# Altium PCB 9,5,12PCB.PcbDoc
Units mil, origin at the board's own origin, x right, y up, seen from the top; angles counter-clockwise.
Board outline 6000 x 4000 mil, 4 copper layers (Top Layer, Signal Layer 1, GND, Bottom Layer), stack 30.634 mil thick; 73 components, 95 nets, 217 pads, 90 vias.
Unrouted connection lines stored in the file: 25.
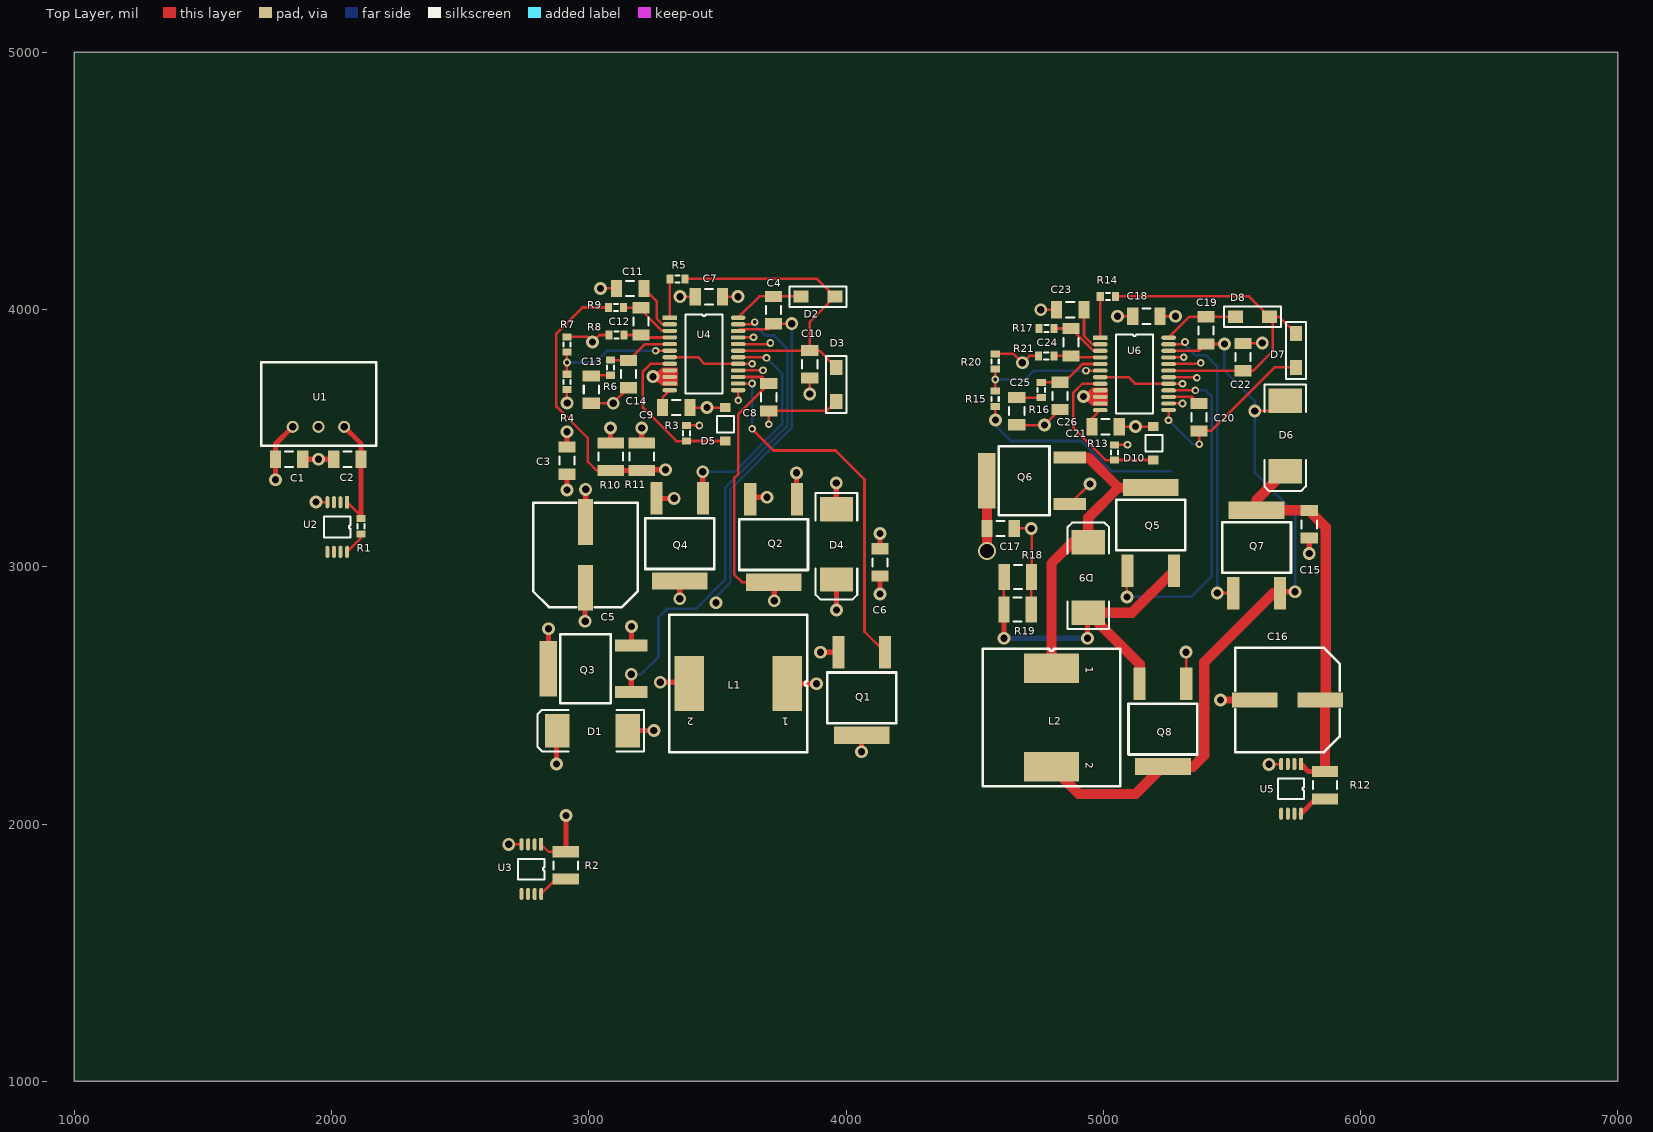
[diagram p0: Top Layer view]
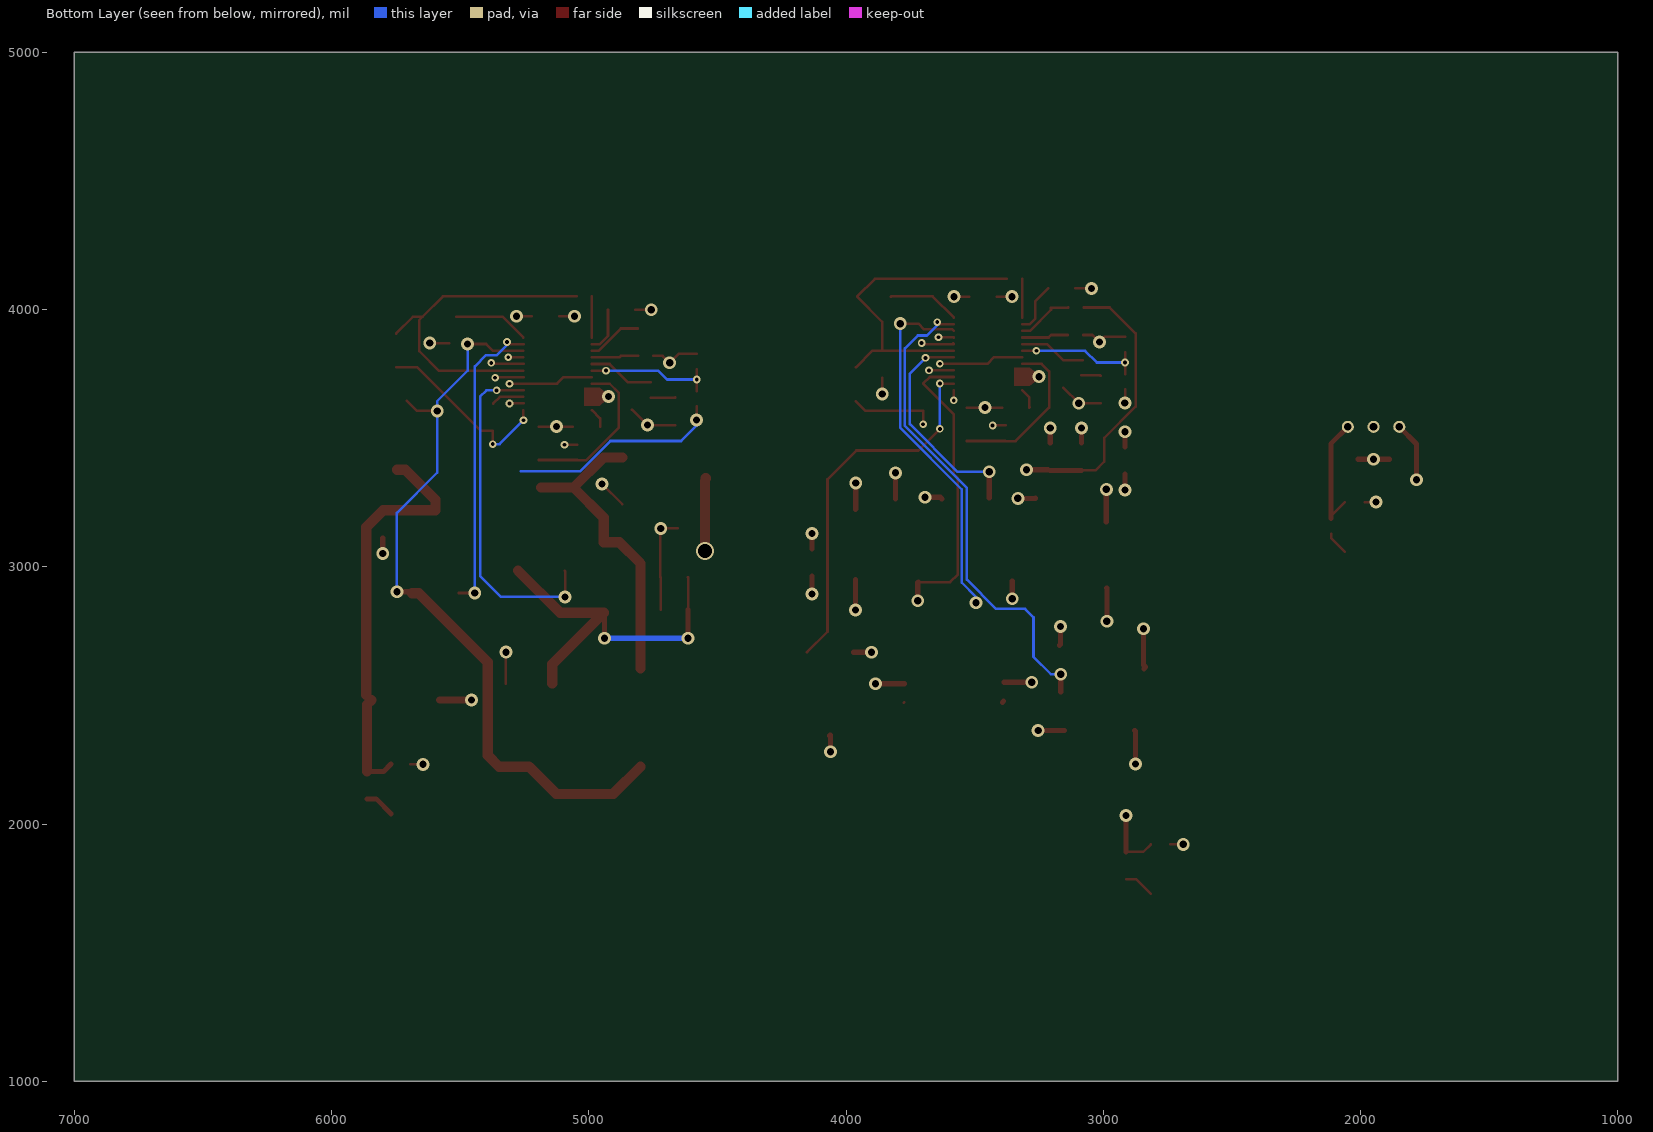
[diagram p1: Bottom Layer view, seen from below]
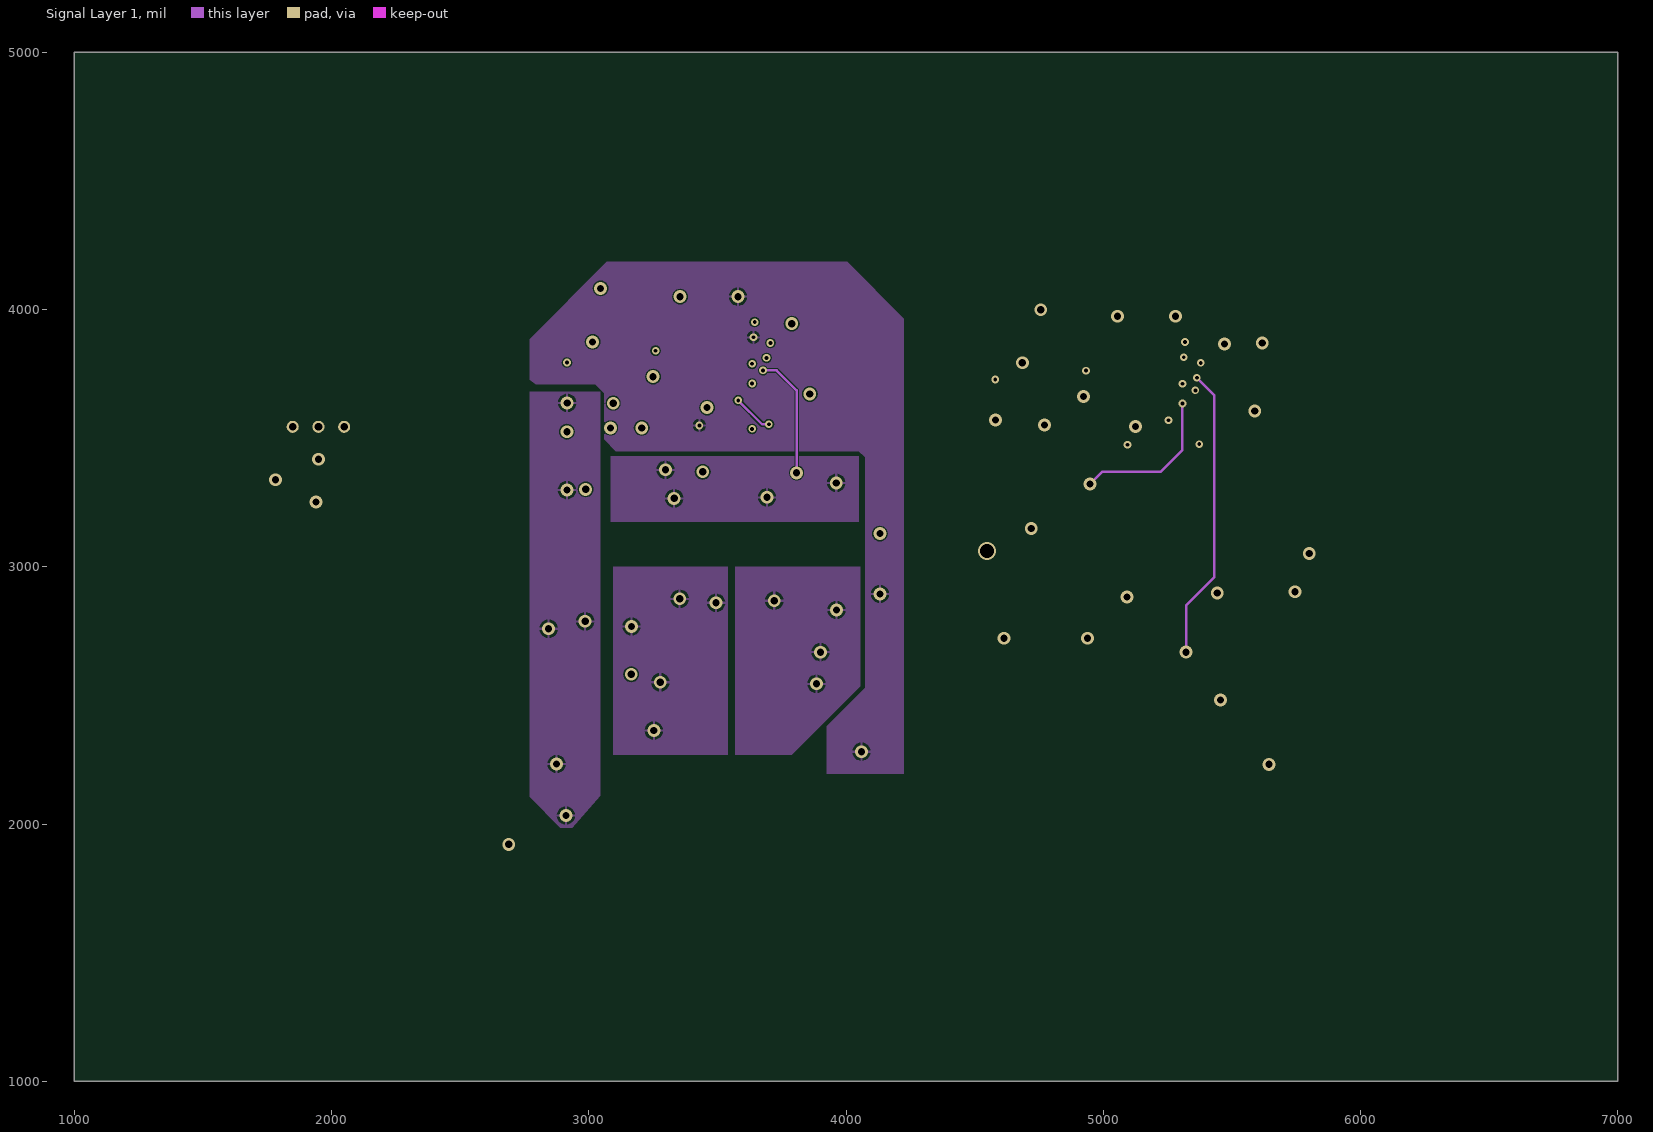
[diagram p2: Signal Layer 1]
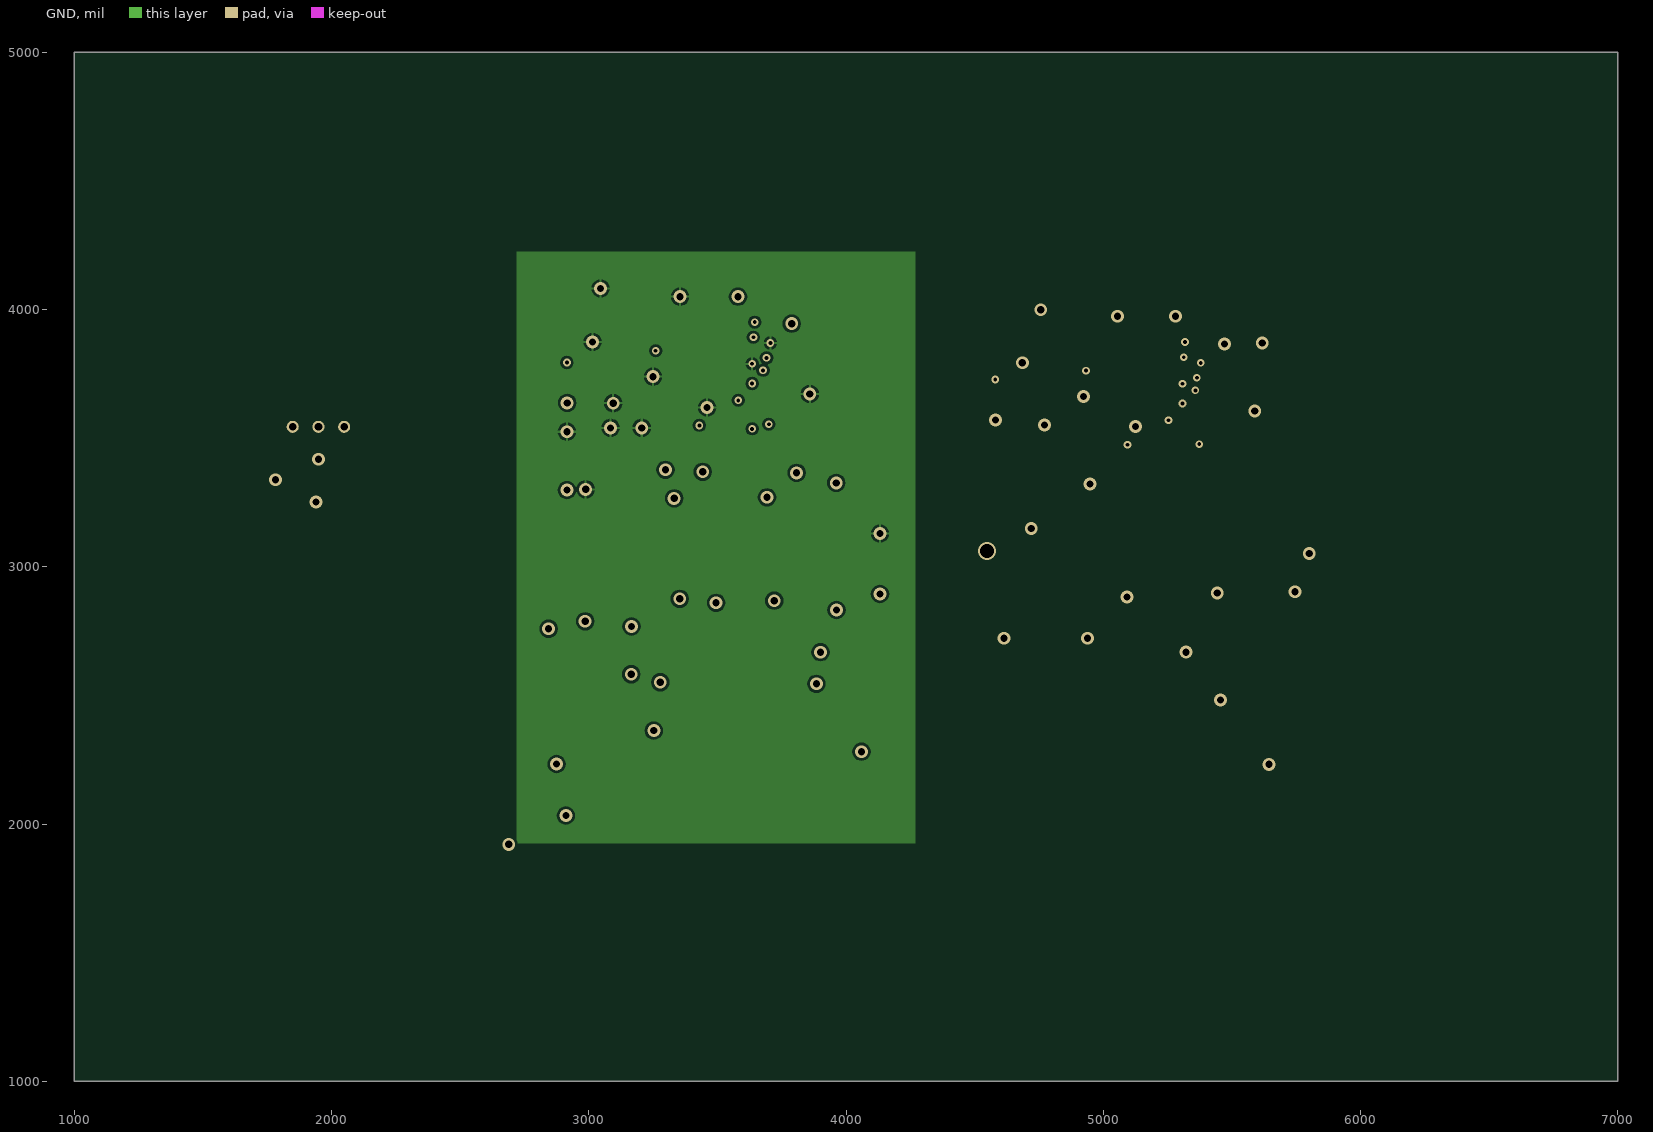
[diagram p3: GND]

## Layer stack, top to bottom
Top Solder: solder mask 0.4, Solder Resist, Dk 3.5
Top Layer: signal copper 1.4
Dielectric 1: core 10, FR-4, Dk 4.2
Signal Layer 1: signal copper 1.417
Dielectric 3: prepreg 5, Dk 4.2
GND: signal copper 1.417
Dielectric 2: core 10, Dk 4.2
Bottom Layer: signal copper 1.4
Bottom Solder: solder mask 0.4, Solder Resist, Dk 3.5

## Board outline
1000,1000 7000,1000 7000,5000 1000,5000

## Design rules (kind name [scope] priority, off if disabled: settings)
Clearance Clearance_2 [InNamedPolygon('GND-No Net')] p1: gap=10 ignorepadtopadclearanceinfootprint=FALSE except(0: Arc-Hole Track-Hole SMDPad-Hole THPad-Hole Via-Hole Fill-Hole Poly-Hole Region-Hole Text-Hole)
Clearance Clearance_1 [InNamedPolygon('14.8V_L02_P008')] p2: gap=10 ignorepadtopadclearanceinfootprint=FALSE except(0: Arc-Hole Track-Hole SMDPad-Hole THPad-Hole Via-Hole Fill-Hole Poly-Hole Region-Hole Text-Hole)
Clearance [All] p3: gap=5 ignorepadtopadclearanceinfootprint=TRUE
PolygonConnect [All] p1: connectstyle=Relief reliefconductorwidth=10 reliefentries=4 polygonreliefangle="90 Angle" airgapwidth=10
RoutingVias [All] p1: holewidth=28 width=50 viastyle="Through Hole" minholewidth=15 minwidth=30 maxholewidth=60 maxwidth=80
SolderMaskExpansion [All] p1: expansion=4
Width [All] p1: maxlimit=50 minlimit=10 preferedwidth=10
30 further rules are at their usual default settings.

## Classes and differential pairs
component class Full_Power_Board: U13
component class 48V: U11 U12
component class 48V_0.5A: U9 U10
component class 19V: C28 D12 D13 D15 Q9 Q10 Q11 Q12 U7 U8
component class 12V: C15 C16 C17 C18 C19 C20 C21 C22 C23 C24 C25 C26 D6 D7 D8 D9 D10 L2 Q5 Q6 Q7 Q8 R12 R13 R14 R15 R16 R17 R18 R19 R20 R21 U5 U6
component class 9V: C3 C4 C5 C6 C7 C8 C9 C10 C11 C12 C13 C14 D1 D2 D3 D4 D5 L1 Q1 Q2 Q3 Q4 R2 R3 R4 R5 R6 R7 R8 R9 R10 R11 U3 U4
component class 5V: C1 C2 R1 U1 U2

## Components (designator, comment, footprint, x,y, rotation, side; value= is the part's Value field where it differs from the comment)
C1 "10uF" C1206 1834.85,3418 r180 top
C2 "10uF" C1206 2062,3418 r0 top
C3 "Cap Semi" C1206 2915,3413 r270 top value=22u
C4 "Cap Semi" C1206 3718,3998 r90 top value=0.22u
C5 "390uF" PCV1E391MCL2GS 2987,3046 r180 top
C6 "Cap Semi" C1206 4132,3017 r270 top value=27u
C7 "Cap Semi" C1206 3467,4050 r0 top value=3.3u
C8 "Cap Semi" C1206 3700,3659 r270 top value=0.22u
C9 "Cap Semi" C1206 3340,3619 r180 top value=0.001u
C10 "Cap Semi" C1206 3859.33,3787.03 r90 top value=4.7u
C11 "Cap Semi" C1206 3161,4082 r0 top value=0.001u
C12 "Cap Semi" C1206 3203,3954 r90 top value=100p
C13 "Cap Semi" C1206 3010,3689 r90 top value=0.01u
C14 "Cap Semi" C1206 3155,3749 r90 top value=100p
C15 "Cap Semi" C1206 5801,3165 r90 top value=22u
C16 "390uF" PCV1E391MCL2GS 5716.51,2482 r270 top
C17 "Cap Semi" C1206 4601,3149 r180 top value=27u
C18 "Cap Semi" C1206 5167.85,3974 r0 top value=3.3u
C19 "Cap Semi" C1206 5399,3919 r90 top value=0.22u
C20 "Cap Semi" C1206 5372,3581 r270 top value=0.22u
C21 "Cap Semi" C1206 5009,3544 r180 top value=0.001u
C22 "Cap Semi" C1206 5543,3815 r270 top value=4.7u
C23 "Cap Semi" C1206 4872,3999 r0 top value=0.001u
C24 "Cap Semi" C1206 4875,3873 r90 top value=100p
C25 "Cap Semi" C1206 4664,3605 r90 top value=0.01u
C26 "Cap Semi" C1206 4832,3664 r90 top value=100p
D1 "MBRS340" SMC 3014.19,2363 r180 top
D2 "1N5819HW" 1N5819HW 3890.94,4050 r180 top
D3 "1N5819HW" 1N5819HW 3962,3709 r270 top
D4 "MBRS340" SMC 3963,3087 r270 top
D5 "MMSZ5230B" MMSZ5230B 3530,3554 r270 top
D6 "MBRS340" SMC 5707,3508.19 r270 top
D7 "1N5819HW" 1N5819HW 5749,3841 r270 top
D8 "1N5819HW" 1N5819HW 5580,3972 r180 top
D9 "MBRS340" SMC 4942,2958 r90 top
D10 "MMSZ5230B" MMSZ5230B 5195,3480 r270 top
L1 "SRR1240-4R7MCT" SRR1240-4R7M 3581,2546 r180 top
L2 "SRR1240-4R7MCT" SRR1240-4R7M 4799,2414.06 r270 top
Q1 "BUK6212-40C" BUK6212-40C 4151.55,2667.83 r180 top locked
Q2 "BUK6212-40C" BUK6212-40C 3809.1,3263 r180 top
Q3 "BUK6212-40C" BUK6212-40C 3165,2513 r90 top
Q4 "BUK6212-40C" BUK6212-40C 3444,3267 r180 top
Q5 "BUK6212-40C" BUK6212-40C 5093.91,2985.17 r0 top
Q6 "BUK6212-40C" BUK6212-40C 4869.83,3243.45 r90 top
Q7 "BUK6212-40C" BUK6212-40C 5505.45,2897.17 r0 top
Q8 "BUK6212-40C" BUK6212-40C 5322.55,2545.83 r180 top
R1 "Res3" J1-0603 2114,3157.47 r270 top value=10m
R2 "Res3" 14-1210 2911,1839 r270 top value=6m
R3 "Res3" J1-0603 3380,3519 r90 top value=51k
R4 "Res3" J1-0603 2915,3719 r270 top value=205k
R5 "Res3" J1-0603 3345,4119 r180 top value=100k
R6 "Res3" J1-0603 3085,3774 r90 top value=100k
R7 "Res3" J1-0603 2915,3864 r270 top value=20k
R8 "Res3" J1-0603 3108,3901 r180 top value=100
R9 "Res3" J1-0603 3106,4008 r180 top value=100
R10 "Res3" 14-1210 3085,3428 r270 top value=0.018
R11 "Res3" 14-1210 3206,3428 r270 top value=0.018
R12 "Res3" 14-1210 5862,2151 r270 top value=3m
R13 "Res3" J1-0603 5044,3444 r90 top value=51k
R14 "Res3" J1-0603 5018,4051 r180 top value=100k
R15 "Res3" J1-0603 4580,3653 r270 top value=113k
R16 "Res3" J1-0603 4759,3687 r90 top value=100k
R17 "Res3" J1-0603 4779.47,3927 r180 top value=100
R18 "Res3" 14-1210 4668.15,2960 r180 top value=0.018
R19 "Res3" 14-1210 4667,2834 r180 top value=0.018
R20 "Res3" J1-0603 4580,3798 r270 top value=8.06k
R21 "Res3" J1-0603 4778.47,3820 r180 top value=100
U1 "R-78E-0.5" R-78E-0.5 1722.62,3465.26 r0 top
U2 "AD8217" AD8217 2060.59,3251 r270 top
U3 "AD8217" AD8217 2815.18,1921 r270 top
U4 "LTC3780EG#PBF" "LTC3780 24-Leaqd Plastic SSOP" 3315,3968.13 r0 top
U5 "AD8217" AD8217 5768.59,2232.91 r270 top
U6 "LTC3780EG#PBF" "LTC3780 24-Leaqd Plastic SSOP" 4988.25,3890.54 r0 top

## Footprints (in the part's own frame and the unit in brackets; to place one, negate y for a bottom-side part, rotate by r counter-clockwise, add the part's x,y. Pads: shape width x height; smd on the part's side, far side on the other; paste and mask are expansions set on the pad)
1N5819HW [mm]
  rect 1.5x1.2 smd: 1(-1.675,0) 2(1.675,0)
  silkscreen extent -2.83,-1 2.83,1
14-1210 [mm] "Chip Resistor, Body 3.2x2.5mm, IPC High Density"
  rect 1.1x2.6 smd: 1(-1.35,0) 2(1.35,0)
  silkscreen extent -0.4,-1.2 0.4,1.2, body extent -1.68,-1.32 1.68,1.32, height 0.9
AD8217 [mm]
  rect 1.2x0.4 smd: 1(0,0)
  oval 1.2x0.4 smd: 2(0,-0.65) 3(0,-1.3) 4(0,-1.95) 5(4.9,-1.95) 6(4.9,-1.3) 7(4.9,-0.65) 8(4.9,0)
  silkscreen extent 1.43,-2.28 3.47,0.33
BUK6212-40C [mm]
  rect 1.2x3.2 smd: 1(0,0) 2(4.6,0)
  rect 5.5x1.7 smd: 3(2.3,8.2)
  silkscreen extent -1.1,2 5.7,7
C1206 [mm] "Chip Capacitor, Body 3.2x1.6mm, IPC High Density"
  rect 1.1x1.7 smd: 1(-1.35,0) 2(1.35,0)
  silkscreen extent -0.4,-0.75 0.4,0.75, body extent -1.7,-0.9 1.7,0.9, height 1.3
J1-0603 [mm] "Chip Resistor, Body 1.6x0.8mm, IPC High Density"
  rect 0.7x0.9 smd: 1(-0.75,0) 2(0.75,0)
  silkscreen extent -0.2,-0.35 0.2,0.35, body extent -0.85,-0.48 0.85,0.48, height 0.9
"LTC3780 24-Leaqd Plastic SSOP" [mm]
  rect 1.45x0.42 smd: 1(0,0)
  oval 1.45x0.42 smd: 2(0,-0.65) 3(0,-1.3) 4(0,-1.95) 5(0,-2.6) 6(0,-3.25) 7(0,-3.9) 8(0,-4.55) 9(0,-5.2) 10(0,-5.85) 11(0,-6.5) 12(0,-7.15) 13(6.75,-7.15) 14(6.75,-6.5) 15(6.75,-5.85) 16(6.75,-5.2) 17(6.75,-4.55) 18(6.75,-3.9) 19(6.75,-3.25) 20(6.75,-2.6) 21(6.75,-1.95) 22(6.75,-1.3) 23(6.75,-0.65) 24(6.75,0)
  silkscreen extent 1.56,-7.48 5.19,0.33
MMSZ5230B [mm]
  rect 0.9x1.025 smd: 1(-1.65,0) 2(1.65,0)
  silkscreen extent -0.8,-0.8 0.8,0.9
PCV1E391MCL2GS [mm]
  rect 1.5x4.5 smd: 1(0,3.25) 2(0,-3.25)
  silkscreen extent -5.15,-5.15 5.15,5.15
R-78E-0.5 [mm]
  round 1.2 hole 0.762: 1(3.21,2) 2(5.75,2) 3(8.29,2)
  silkscreen extent 0.13,0.13 11.48,8.37
SMC [mm] "DO-214-AB/SMC; 2 C-Bend Leads; Body 7.9 x 5.9 mm, inc. leads (LxW)"
  rect 2.4x3.3 smd: 1(-3.475,0) 2(3.475,0)
  silkscreen extent -5.07,-2.05 5.43,2.05
SRR1240-4R7M [mm]
  rect 2.9x5.4 smd: 1(-4.85,0) 2(4.85,0)
  silkscreen extent -6.8,-6.8 6.8,6.8

## Part data
C1 C2: library part "Cap Semi", "Capacitor (Semiconductor SIM Model)", LatestRevisionDate=29-May-2009, LatestRevisionNote="IPC-7351 Footprint Added.", PackageDescription="Chip Capacitor", PackageReference=C1206, Published=8-Jun-2000, Publisher="Altium Limited"
C3 C4 C6 C7 C8 C9 C10 C11 C12 C13 C14 C15 C17 C18 C19 C20 C21 C22 C23 C24 C25 C26: "Capacitor (Semiconductor SIM Model)", LatestRevisionDate=29-May-2009, LatestRevisionNote="IPC-7351 Footprint Added.", PackageDescription="Chip Capacitor", PackageReference=C1206, Published=8-Jun-2000, Publisher="Altium Limited"
C5 C16: library part PCV1E391MCL2GS, "Aluminum Capacitor"
D1 D4 D6 D9: library part Diode, "Default Diode", Code_JEDEC=DO-214-AB, LatestRevisionDate=17-Jul-2002, LatestRevisionNote="Re-released for DXP Platform.", PackageDescription="DO-214-AB/SMC; 2 C-Bend Leads; Body 7.9 x 5.9 mm, inc. leads (LxW)", PackageReference=SMC, PackageVersion=Sep-1996, Published=8-Jun-2000, Publisher="Altium Limited"
D2 D3 D7 D8: "1A Schottky Barrier Rectifier"
D5 D10: "Zener Diode"
L1 L2: "Inductor"
Q1 Q2 Q3 Q4 Q5 Q6 Q7 Q8: "N-Channel TrenchMOS Intermediate Level FET"
R1 R2 R3 R4 R5 R6 R7 R8 R9 R10 R11 R12 R13 R14 R15 R16 R17 R18 R19 R20 R21: "Resistor", LatestRevisionDate=29-May-2009, LatestRevisionNote="IPC-7351 Footprint Added.", PackageDescription="Chip Resistor", PackageReference=J1-0603, Published=8-Jun-2000, Publisher="Altium Limited"
U1: "DC/DC Converter"
U2 U3 U5: "Current Shunt Moniter"
U4 U6: "Buck-boost Controller, Constant Frequency, Current Mode Control with Power Good Output, 24-pin SOP (G-24), -40 to 85 degC, Pb-Free", Frequency Sync Range="200kHz - 400kHz", Manufacturer="Linear Technology", PackageDesciption="24-Pin Plastic SSOP, Body 8.2 x 5.3 mm, Pitch 0.65 mm", Supplier Part Number 1=LTC3780EG#PBF-ND, ComponentLink1Description="Manufacturer URL", ComponentLink1URL=http://www.linear.com/, ComponentLink2Description=Datasheet, ComponentLink2URL=http://cds.linear.com/docs/en/datasheet/3780ff.pdf, ComponentLink3Description="Package Specification", ComponentLink3URL=http://cds.linear.com/docs/en/packaging/SSOP_24_05-08-1640.pdf, DatasheetVersion="Rev. F", Mounting Technology="Surface Mount", Number of Outputs=1, PackageReference=G-24, PackageVersion=Jun-10, PartNumber=LTC3780EG#PBF, RoHS=TRUE, Supplier 1=Digi-Key, Supplier 2=Farnell, Supplier 3=Newark, Supplier Part Number 2=1273545, Supplier Part Number 3=56M8395

## Via types
v1: diameter 50, hole 28, Top Layer to Bottom Layer, 64 vias
v2: diameter 30, hole 15, Top Layer to Bottom Layer, 25 vias
v3: diameter 70, hole 55, Top Layer to Bottom Layer, 1 vias

## Nets (pads, with @x,y where several pads share a name; then routed paths per layer and width w, separated by ;. In a path a pad name is that pad's centre, name@x,y a point inside that pad or via, vN(x,y) a via of type N, cw(c..) or ccw(c..) an arc to the next point about the centre after c; other vN are vias at no path point)
14.8V: C1.2 C6.2 C7.2 C17.2 C18.2 Q1.3 Q6.3 R3.2 R13.2 U1.1 U4.21 U6.21 | length 981.5
  Top Layer w10: R3.2@3380,3549.47 v2(3430,3549.47) ; C7.2 v1(3580,4050) ; U4.21 3581.39,3892 v2(3640,3892) ; Q6.3@4544,3344 Q6.3@4544.85,3343.15 ; C17.2 C17.2@4548,3148.85 ; R13.2@5044,3474.47 v2(5094,3474.47) ; C18.2@5221.15,3974 v1(5281,3974) ; U6.21@5254.39,3814.66 v2(5313,3814.66)
  Top Layer w20: v1(1781.7,3338.3) C1.2 1781.7,3476.7 U1.1 ; v1(4060,2281) 4060,2340 4063,2343 Q1.3 ; v1(4132,2894.13) C6.2
  Top Layer w40: Q6.3@4544.85,3343.15 Q6.3@4544.85,3344 ; C17.2 Q6.3@4547.85,3333.15 ; v3(4548,3061) C17.2@4548,3148.85
BG1-9V: Q4.1 U4.18 | length 870.1
  Top Layer w10: U4.18 v2@3681.41,3814.59
  Top Layer w20: Q4.1@3443,3268 v1(3443,3369.19)
  Bottom Layer w10: v1(3443,3369.19) 3566.19,3369.19 3752,3555 3752,3751 v2(3691,3812)
BG2-9V: Q2.1 U4.16 | length 681.4
  Top Layer w10: U4.16 v2(3677.41,3763.41)
  Top Layer w20: Q2.1@3808.1,3264 v1(3808.1,3365.19)
  Signal Layer 1 w10: v2(3677.41,3763.41) 3730.59,3763.41 3808.1,3685.9 v1(3808.1,3365.19)
GND: C1.1 C2.1 C3.1 C5.2 C6.1 C7.1 C9.1 C10.1 C11.1 C13.1 C14.1 C15.1 C16.2 C17.1 C18.1 C21.1 C22.1 C23.1 C25.1 C26.1 D5.1 D10.1 R7.1 R8.2 R10.1 R11.1 R18.1 R19.1 R20.1 R21.2 U1.2 U2.4 U3.4 U4.7 U4.9 U4.10 U4.11 U4.17 U4.20 U5.4 U6.7 U6.9 U6.10 U6.11 U6.17 U6.20 | length 3518.9
  Top Layer w10: v1(1940,3252) 1941,3251 U2.4 ; v1(2689,1921) U3.4 ; R7.1 2995.47,3893.53 v1(3015,3874) 3042,3901 R8.2 ; C13.1 v1(3095,3635.85) C14.1 ; v1(3046,4082) C11.1 ; v1@3236.85,3725.85 v1(3250,3739) ; U4.7 3424.41,3814.59 3450,3789 U4.17 v2(3635,3789) ; v1(3355,4050) C7.1 ; C9.1 3393.19,3618.96 v1(3460,3618.96) D5.1 ; U4.20@3582.98,3868 U4.20 3701.77,3865.77 v2(3706,3870) ; v1(3859.33,3671.67) C10.1 ; R20.1 4650.95,3827.53 v1(4685.47,3793) 4712.47,3820 R21.2 ; C17.1 v1(4720,3149) 4721.3,3147.7 R18.1 4720.15,2958.85 R19.1 ; C25.1@4664,3550.85 v1(4772,3550.85) C26.1 ; v1(4757,3999) C23.1 ; U6.7@4988,3737.25 5097.41,3737.25 5123,3711.66 v2(5308,3711.66) ; v1(5056,3974) C18.1 C18.1@5114.85,3974 ; C21.1 5063.15,3545 v1(5125,3545) v1(5125,3545) D10.1 ; U6.20@5253.75,3788.43 5374.77,3788.43 v2(5379,3792.66) ; C22.1 5616.15,3868.15 v1(5618,3870) ; v1(5644,2232) U5.4@5693.41,2232
  Top Layer w20: C1.1 v1(1949,3418) C2.1 ; C3.1 v1(2915,3525) ; C5.2 2988,3174.95 v1(2988,3301) ; R10.1 v1(3085,3540) ; R11.1 v1(3206,3540) ; C6.1 v1(4132,3129) ; v1(5801,3052) C15.1
  Top Layer w28: v1(5455.95,2482) C16.2@5580.05,2482
  other v1: 4923.25,3661.41
NetC2_2: C2.2 R1.1 U1.3 U2.1 | length 471
  Top Layer w10: U2.1 2114,3197.59 R1.1 ; C2.2@2114,3416.85 C2.2
  Top Layer w20: U1.3 2115.15,3477.85 C2.2 ; R1.1 C2.2@2114,3416.85
NetC3_2: C3.2 C5.1 D1.2 Q3.3 R2.1 R4.2 U3.1 | length 786.2
  Top Layer w10: U3.1 2844.03,1892.15 R2.1 ; R4.2 2915,3638 v1(2916,3637)
  Top Layer w20: Q3.3 2835.72,2610 2844,2618.28 v1(2844,2759) ; v1(2875,2233) 2875,2360.62 D1.2 ; R2.1 v1(2911,2032.87) ; v1(2915,3298) C3.2 ; v1(2986,2788) 2986,2917.05 C5.1
NetC4_1: C4.1 D1.1 L1.2 Q3.2 Q4.3 U4.22 | length 1786.3
  Top Layer w10: U4.22 3586.8,3923 3696.15,3923 C4.1 3788.85,3944.85 v1(3789,3945)
  Top Layer w20: D1.1 v1(3253,2363) ; v1(3166,2768) 3166,2698.9 Q3.2@3170,2694.9 ; v1(3278,2551) L1.2@3385.06,2551 ; v1(3353.45,2875.45) Q4.3 ; L1.2@3387.06,2478 L1.2@3392.06,2473
  Bottom Layer w10: v1(3495,2860) 3495,2883 3550,2938 3550,3301 3789,3540 v1(3789,3945)
NetC4_2: C4.2 D2.2 U4.24 | length 279.1
  Top Layer w10: U4.24 3663.76,4051.15 C4.2 3823.85,4051.15 D2.2
NetC8_1: C8.1 D4.2 L1.1 Q1.2 Q2.3 U4.15 | length 1468.4
  Top Layer w10: U4.15 3674.33,3737.82 C8.1 3581.43,3593.57 3581.43,3361.43 3565,3345 3565,2970 3594.83,2940.17 Q2.3 ; L1.1@3773.94,2473 L1.1@3774.94,2472
  Top Layer w20: Q2.3 3721,2937.72 v1(3721,2868) ; L1.1@3772.94,2545 v1(3885,2545) ; v1(3900.73,2667.83) Q1.2 ; v1(3963,2832) D4.2
NetC8_2: C8.2 D3.2 U4.13 | length 526.5
  Top Layer w10: U4.13 3581,3686.39 v2(3581,3647) ; v2(3700,3554) C8.2 3924.8,3605.85 D3.2
  Signal Layer 1 w10: v2(3581,3647) 3674,3554 v2(3700,3554)
NetC9_2: C9.2 U4.12 | length 81.9
  Top Layer w10: C9.2@3285,3620.85 C9.2 3286.85,3658.49 U4.12
NetC10_2: C10.2 D2.1 D3.1 R5.1 U4.19 | length 1269.4
  Top Layer w10: R5.1 3784,4119 3887.89,4119 D2.1 3859.33,3952.44 C10.2 ; U4.19 C10.2 ; D3.1 3896.76,3840.18 C10.2
NetC11_2: C11.2 U4.2 | length 198
  Top Layer w10: C11.2 3265,4031.15 3265,3964 3286.46,3942.54 U4.2
NetC12_1: C12.1 R8.1 U4.4 | length 181.5
  Top Layer w10: R8.1 3137.68,3900.85 C12.1 3212.49,3891.36 U4.4
NetC12_2: C12.2 R9.1 U4.3 | length 221.9
  Top Layer w10: R9.1 3136.38,4007.15 C12.2 3203,3999.15 3285.2,3916.95 U4.3
NetC13_2: C13.2 R6.1 | length 76
  Top Layer w10: C13.2 3012.32,3744.47 R6.1
NetC14_2: C14.2 R6.2 U4.5 | length 261.9
  Top Layer w10: R6.2@3080,3803.53 R6.2 3086.38,3802.15 C14.2 3218.62,3865.77 U4.5
NetC15_2: C15.2 C16.1 D6.2 Q7.3 R12.1 R15.2 U5.1 | length 2436.3
  Top Layer w10: v1@4580,3572 R15.2 ; C15.2@5799.15,3220 C15.2 ; C16.1 C16.1@5865,2502.54
  Top Layer w20: U5.1 5797.35,2204.15 R12.1
  Top Layer w40: D6.2@5745,3377.19 5712.81,3377.19 D6.2 5596,3260.38 Q7.3 C15.2@5799.15,3220 ; C15.2 5865,3154.15 C16.1@5865,2502.54 ; C16.1 5862,2464.46 R12.1
  Bottom Layer w10: v1(4581,3571) 4581,3549 4641,3489 4916,3489 5034,3371 5265,3371
NetC19_1: C19.1 D6.1 L2.2 Q7.2 Q8.3 U6.22 | length 2969.7
  Top Layer w10: U6.22 5254.3,3839.66 5323.36,3839.66 5323.65,3839.36 5372.51,3839.36 C19.1 5399.15,3866 v1(5471,3866) ; v1(5589,3606) 5668,3606 D6.1 ; Q7.2 5688.72,2895 Q7.2@5696.72,2903
  Top Layer w20: Q7.2@5696.72,2903 v1(5746,2903)
  Top Layer w40: L2.2 4905.11,2117 5126,2117 Q8.3 5349,2223 5393,2267 5393,2629 5661.17,2897.17 Q7.2
  Bottom Layer w10: v1(5471,3866) 5471,3762 5589,3644 v1(5589,3606) 5589,3366 5746,3209 v1(5746,2903)
NetC19_2: C19.2 D8.2 U6.24 | length 293.9
  Top Layer w10: U6.24 5335.61,3972.15 C19.2 5513.91,3972.15 D8.2
NetC20_1: C20.1 D9.2 L2.1 Q5.3 Q6.2 U6.15 | length 1338.4
  Top Layer w10: U6.15 5345.92,3660.23 C20.1
  Top Layer w40: L2.1 4799,3013 4880.81,3094.81 D9.2 4942,3190.54 5059.46,3308 ; Q6.2 4942.91,3424.55 5059.46,3308 ; Q5.3 5059.46,3308
NetC20_2: C20.2 D7.2 U6.13 | length 726.9
  Top Layer w10: v2(5254,3569.66) U6.13 ; v2(5373,3476.66) 5373,3528.51 5419.51,3528.51 5666.06,3775.06 D7.2
  Bottom Layer w10: v2(5254,3569.66) 5347,3476.66 v2(5373,3476.66)
NetC21_2: C21.2 U6.12 | length 78.5
  Top Layer w10: C21.2 4955.85,3576.65 U6.12
NetC22_2: C22.2 D7.1 D8.1 R14.1 U6.19 | length 1337.4
  Top Layer w10: R14.1 5566.94,4051 D8.1 ; U6.19 5254.74,3761.85 C22.2 5582.85,3761.85 5659,3838 5659,3958.94 D8.1 ; D7.1 5683.94,3972 D8.1
NetC23_2: C23.2 U6.2 | length 178.3
  Top Layer w10: C23.2 4925.15,3897.21 4957.41,3864.95 U6.2
NetC24_1: C24.1 R21.1 U6.4 | length 182.8
  Top Layer w10: R21.1 4808.15,3819.85 C24.1 4881.08,3813.77 U6.4
NetC24_2: C24.2 R17.1 U6.3 | length 215.6
  Top Layer w10: R17.1 4809.85,3926.15 C24.2 4961.79,3839.36 U6.3
NetC25_2: C25.2 R16.1 | length 95.3
  Top Layer w10: C25.2 4664.68,3657.47 R16.1
NetC26_2: C26.2 R16.2 U6.5 | length 258.9
  Top Layer w10: R16.2 4759.62,3717.15 C26.2 4848.15,3717.15 4919.18,3788.18 U6.5
NetC27_2: 
NetC31_1: 
NetC31_2: 
NetC32_1: 
NetC32_2: 
NetC33_2: 
NetC34_2: 
NetC35_2: 
NetC36_1: 
NetC36_2: 
NetC37_2: 
NetC38_2: 
NetC39_2: 
NetC40_2: 
NetC41_2: 
NetC42_2: 
NetC43_2: 
NetC44_2: 
NetC45_2: 
NetC46_2: 
NetD4_1: D4.1 Q2.2 Q4.2 R9.2 R10.2 R11.2 | length 1355.1
  Top Layer w10: R9.2 2975,4008 2874,3907 2874,3623 2996,3501 2996,3409 3030.15,3374.85 R10.2 ; R11.2 3209.85,3371 R11.2@3215.85,3377
  Top Layer w20: R10.2 R11.2 ; R11.2@3215.85,3377 v1(3298,3377) ; Q4.2 3263.9,3266 v1(3332,3266) ; Q2.2 3627,3264 3633,3270 v1(3693,3270) ; v1(3962,3326) 3962,3224.81 D4.1
NetD5_2: D5.2 R3.1 U4.8 | length 631.7
  Top Layer w10: U4.8 3240,3789 3210,3759 3210,3619 3340.47,3488.53 3380,3488.53 3380.51,3489.04 D5.2
NetD9_1: D9.1 Q5.2 Q8.2 R17.2 R18.2 R19.2 | length 1422.9
  Top Layer w10: R19.2@4614,2833.85 R19.2 4613.85,2958.85 R18.2 ; D9.1@4939,2818.19 D9.1
  Top Layer w20: v1(4614,2722) R19.2@4614,2833.85 ; v1(4939,2722) D9.1@4939,2818.19
  Top Layer w40: Q8.2 5141.45,2621.74 D9.1 5111.04,2821.19 Q5.2
  Bottom Layer w20: v1(4614,2722) v1(4939,2722)
NetD10_2: D10.2 R13.1 U6.8 | length 618.7
  Top Layer w10: U6.8 4918.41,3711.41 4884,3677 4884,3540 5009.53,3414.47 R13.1 5044.57,3415.04 D10.2
NetD14_1: 
NetD15_2: 
NetD16_1: 
NetD17_1: 
NetP2_3: R1.2 U2.8 | length 92
  Top Layer w10: U2.8 2114,3111.5 R1.2
NetP2_9: U2.5
NetP2_10: U3.5
NetP2_11: U5.5
NetP2_12: 
NetP2_13: 
NetP2_14: 
NetQ5_1: Q5.1 U6.16 | length 1335
  Top Layer w10: v1(5092,2883) 5092,2983.25 Q5.1 ; U6.16@5253.75,3686.07 v2@5350.41,3686.07
  Bottom Layer w10: v1(5092,2883) 5341,2883 5422,2964 5422,3662 5398.34,3685.66 v2(5358,3685.66)
NetQ6_1: Q6.1 U6.14 | length 760.5
  Top Layer w10: Q6.1 v1(4948,3321.61) ; U6.14@5253.75,3634.89 v2(5308,3634.89)
  Signal Layer 1 w10: v1(4948,3321.61) 4996.39,3370 5224,3370 5308,3454 v2(5308,3634.89)
NetQ7_1: Q7.1 U6.23 | length 1182.6
  Top Layer w10: U6.23@5253.75,3865.2 5309.54,3865.2 v2(5318,3873.66) ; v1(5443,2898) 5504.61,2898 Q7.1
  Bottom Layer w10: v2(5318,3873.66) 5318,3862 5357,3823 5399,3823 5443,3779 v1(5443,2898)
NetQ8_1: Q8.1 U6.18 | length 1374.1
  Top Layer w10: U6.18@5253.75,3737.25 5361.41,3737.25 v2(5364,3734.66) ; v1(5322,2668) 5322,2546.39 Q8.1
  Signal Layer 1 w10: v1(5322,2668) 5322,2850 5432,2960 5432,3666.66 v2(5364,3734.66)
NetQ9_1: 
NetQ10_1: 
NetQ11_1: 
NetQ12_1: 
NetR2_2: R2.2 U3.8 | length 119.7
  Top Layer w10: U3.8 2872.95,1785.85 R2.2
NetR4_1: R4.1 R7.2 U4.6 | length 505.1
  Top Layer w10: R4.1 v2(2915,3794) R7.2 ; v2(3260,3840) 3260.18,3840.18 U4.6
  Bottom Layer w10: v2(2915,3794) 3025,3794 3070,3839 3259,3839 v2(3260,3840)
NetR5_2: R5.2 U4.1 | length 151.1
  Top Layer w10: U4.1 3315.47,3968.61 R5.2
NetR12_2: R12.2 U5.8 | length 117.4
  Top Layer w20: U5.8 5826.44,2097.85 R12.2
NetR14_2: R14.2 U6.1 | length 160.5
  Top Layer w10: U6.1 4988.47,3890.76 R14.2
NetR15_1: R15.1 R20.2 U6.6 | length 508.3
  Top Layer w10: R15.1 v2(4580,3728) R20.2 ; v2@4933.43,3762.59 U6.6
  Bottom Layer w10: v2(4580,3728) 4696,3728 4730.41,3762.41 v2(4933.25,3762.41)
NetR22_2: 
NetR24_2: 
NetR25_1: 
NetR33_2: 
NetR34_1: 
NetR35_1: 
NetR37_2: 
NetR38_2: 
NetR40_2: 
NetR41_1: 
NetR42_1: 
NetR44_2: 
NetR45_2: 
NetU10_3: 
NetU12_3: 
TG1-9V: Q3.1 U4.23 | length 1918
  Top Layer w10: U4.23 3636.54,3942.54 v2(3645,3951)
  Top Layer w20: Q3.1 v1(3165,2582.1)
  Bottom Layer w10: v1(3165,2582.1) 3203.1,2582.1 3271,2650 3271,2803 3304,2836 3416,2836 3530,2950 3530,3307 3771,3548 3771,3849 3721,3899 3685,3899 3645,3939 v2(3645,3951)
TG2-9V: Q1.1 U4.14 | length 1453.8
  Top Layer w10: U4.14 v2(3635,3712.23) ; v2(3635,3536) 3719,3452 3960,3452 4072,3340 4072,2747.39 Q1.1
  Bottom Layer w10: v2(3635,3536) v2(3635,3712.23)
pads on no net: U2.2 U2.3 U2.6 U2.7 U3.2 U3.3 U3.6 U3.7 U5.2 U5.3 U5.6 U5.7

## Polygon pours and split planes (outlines as drawn)
GND on GND "GND-No Net" (solid, pour order 4): 2720,4225 4270,4225 4270,1925 2720,1925
14.8V on Signal Layer 1 (solid, pour order 30): 3925,2195 3925,2380 4075,2530 4075,3425 4050,3450 3105,3450 3060,3495 3060,3675 3025,3710 2793.33,3710 2770,3727.5 2770,3885 3070,4185 4005,4185 4225,3965 4225,2195
NetC3_2 on Signal Layer 1 (solid, pour order 28): 3045,2195 2770,2195 2770,2105 2890,1985 2935,1985 3045,2110
NetC3_2 on Signal Layer 1 (solid, pour order 26): 3045,2185 3045,3680 2770,3680 2770,2185
no net on Signal Layer 1 (solid, pour order 24): 3570,3415
NetD4_1 on Signal Layer 1 (solid, pour order 22): 4050,3175 3085,3175 3085,3430 4050,3430
no net on Signal Layer 1 (solid, pour order 20): 3325,2185
NetC4_1 on Signal Layer 1 (solid, pour order 18): 3540,3000 3095,3000 3095,2270 3540,2270
NetC8_1 on Signal Layer 1 (solid, pour order 16): 3570,3000 4055,3000 4055,2535 3790,2270 3570,2270
no net on Signal Layer 1 (solid, pour order 14): 3576,3002
no net on Signal Layer 1 (solid, pour order 12): 3576,3002
no net on Signal Layer 1 (solid, pour order 10): 3576,3002

## Other copper
Top Layer:
  region net GND: 5018.25,3696.41 5018.25,3626.41 4958.25,3626.41 4933.25,3646.41 4913.25,3646.41 4908.25,3651.41 4908.25,3671.41 4913.25,3676.41 4933.25,3676.41 4958.25,3696.41
  region net GND: 3252.5,3724
  region net GND: 3345,3774 3345,3704 3285,3704 3260,3724 3240,3724 3235,3729 3235,3749 3240,3754 3260,3754 3285,3774

## Text inside footprints (layer, text, board x,y; h text height)
L1: Top Overlay "1" at 3777.85,2412.14 h30 r180; Top Overlay "1" at 3777.85,2412.14 h30 r180; Top Overlay "2" at 3407.77,2412.14 h30 r180
L2: Top Overlay "1" at 4932.86,2610.91 h30 r270; Top Overlay "1" at 4932.86,2610.91 h30 r270; Top Overlay "2" at 4932.86,2240.83 h30 r270